# Altium PCB PCB2.PcbDoc
Units mm, origin at the board's own origin, x right, y up, seen from the top; angles counter-clockwise.
Board outline 116.59 x 88.77 mm, 2 copper layers (Top Layer, Bottom Layer); 12 components, 14 nets, 81 pads, 0 vias.
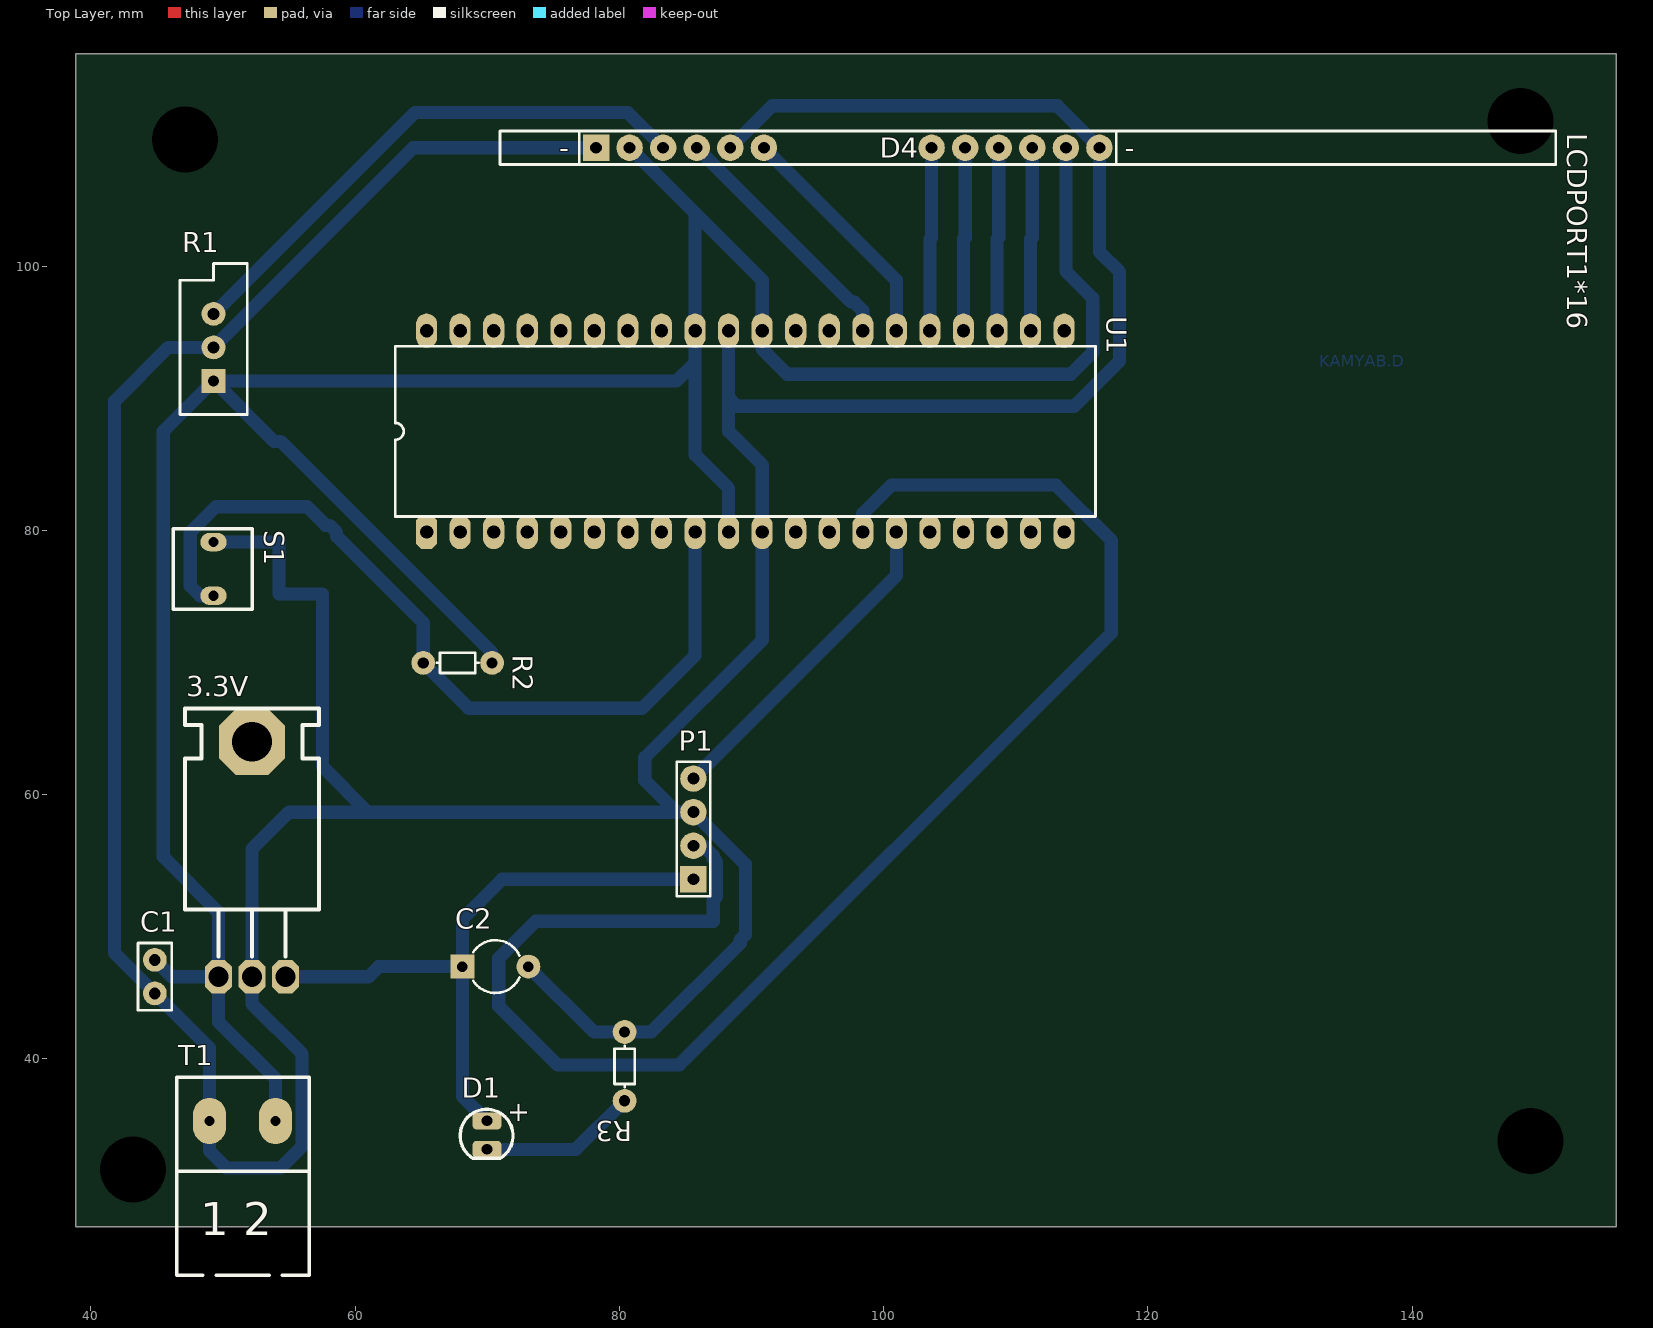
[diagram p0: Top Layer view]
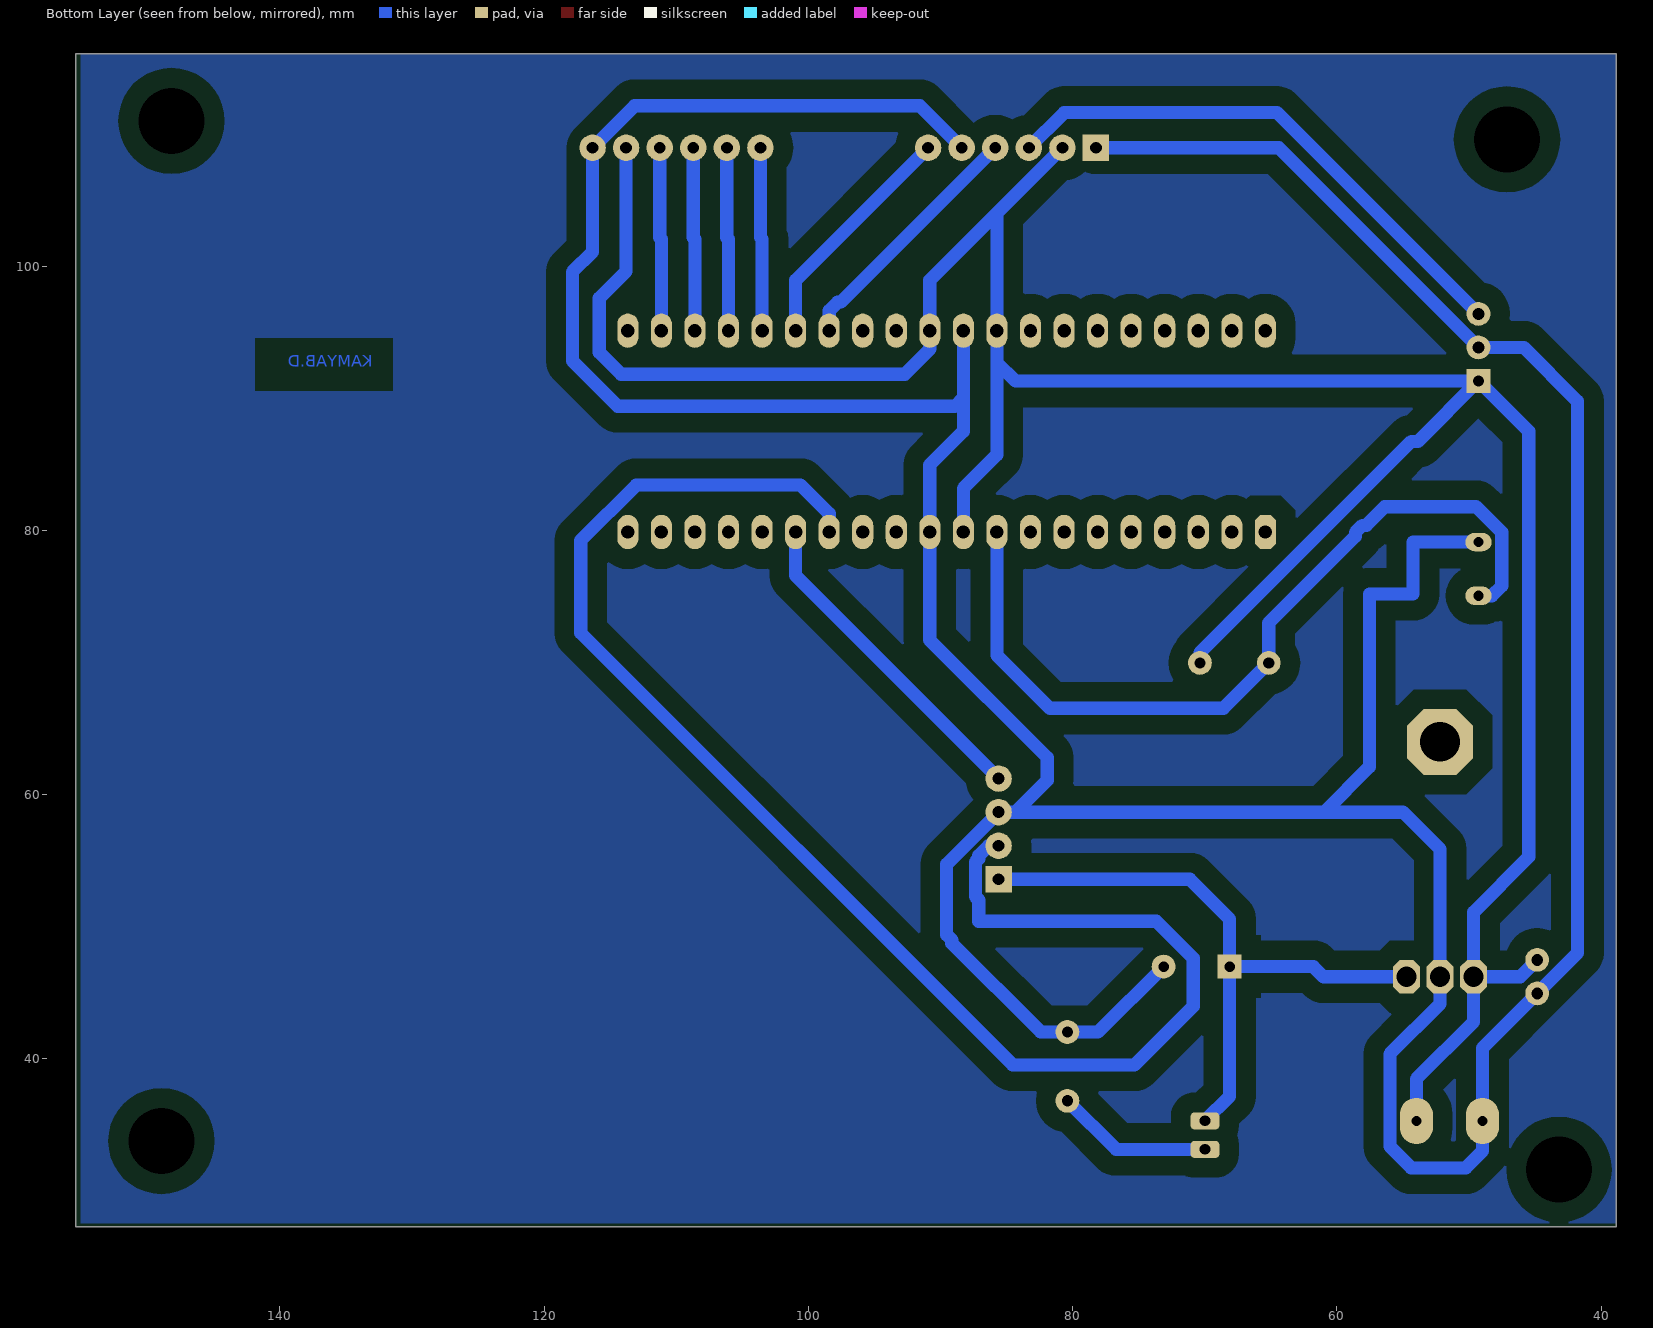
[diagram p1: Bottom Layer view, seen from below]

## Layer stack, top to bottom
Top Solder: solder mask 0.0102, Solder Resist, Dk 3.5
Top Layer: signal copper 0.0356
Dielectric 1: dielectric 0.32, FR-4, Dk 4.8
Bottom Layer: signal copper 0.0356
Bottom Solder: solder mask 0.0102, Solder Resist, Dk 3.5

## Board outline
38.862,27.305 155.448,27.305 155.448,116.078 38.862,116.078

## Design rules (kind name [scope] priority, off if disabled: settings)
Clearance pol [InPolygon] p1: gap=1.5
Clearance [All] p2: gap=0.254
PolygonConnect [All] p1: connectstyle=Relief reliefconductorwidth=0.254 reliefentries=4 polygonreliefangle="90 Angle" airgapwidth=0.254
RoutingVias [All] p1: holewidth=0.711 width=1.27 viastyle="Through Hole" minholewidth=0.711 minwidth=1.27 maxholewidth=0.711 maxwidth=1.27
SolderMaskExpansion [All] p1: expansion=0.102
Width [All] p1: maxlimit=1 minlimit=1 preferedwidth=1
30 further rules are at their usual default settings.

## Components (designator, comment, footprint, x,y, rotation, side; value= is the part's Value field where it differs from the comment)
3.3V "7805" My_TO-220 49.657,46.228 r0 top
C1 "Cap" RAD-0.1 44.831,46.228 r90 top
C2 "Cap2" CAPR5-4X5 70.612,46.99 r0 top
D1 "LED 3mm" LED-3mm 69.85,34.29 r0 top
LCDPORT1*16 "LCDPORT1*16" HDR1X16 70.866,108.966 r0 top
P1 "Header 4" HDR1X4 85.598,53.594 r90 top
R1 "RPot" VR5 49.276,93.853 r90 top
R2 "Resistor vertical" Res50 68.961,69.977 r0 top
R3 "Resistor vertical" Res50 80.391,38.227 r270 top
S1 "PB-2pin" PB-2pin 46.228,80.137 r270 top
T1 "Phoenix terminal" "phoenix terminal 2" 46.482,23.622 r0 top
U1 "ATmega16-16PI" My_40P6 89.535,87.503 r0 top

## Footprints (in the part's own frame and the unit in brackets; to place one, negate y for a bottom-side part, rotate by r counter-clockwise, add the part's x,y. Pads: shape width x height; smd on the part's side, far side on the other; paste and mask are expansions set on the pad)
CAPR5-4X5 [mm] "Capacitor; 2 Leads"
  rect 1.8x1.8 hole 0.8: 1(-2.5,0)
  round 1.8 hole 0.8: 2(2.5,0)
  silkscreen extent -1.69,-2 1.82,2
HDR1X4 [mm] "Connector; Header; 4 Position"
  rect 2x2 hole 0.9: 1(0,0)
  round 2 hole 0.9: 2(2.54,0) 3(5.08,0) 4(7.62,0)
  silkscreen extent -1.27,-1.27 8.89,1.27
HDR1X16 [mm] "LCD; Connector; Header; 16 Position"
  rect 2x2 hole 0.9: 1(7.366,0)
  round 2 hole 0.9: 2(9.906,0) 3(12.446,0) 4(14.986,0) 5(17.526,0) 6(20.066,0) 11(32.766,0) 12(35.306,0) 13(37.846,0) 14(40.386,0) 15(42.926,0) 16(45.466,0)
  silkscreen extent 0.1,-1.27 80,1.27
LED-3mm [mm] "LED; 2 Leads"
  rrect50% 2.2x1.3 hole 0.8: 1(0.127,1.016) 2(0.127,-1.143)
  silkscreen extent -1.9,-1.81 2.09,1.89
My_40P6 [mm]
  oct 1.6x2.6 hole 1.016: 1(-24.13,-7.62)
  oval 1.6x2.6 hole 1.016: 2(-21.59,-7.62) 3(-19.05,-7.62) 4(-16.51,-7.62) 5(-13.97,-7.62) 6(-11.43,-7.62) 7(-8.89,-7.62) 8(-6.35,-7.62) 9(-3.81,-7.62) 10(-1.27,-7.62) 11(1.27,-7.62) 12(3.81,-7.62) 13(6.35,-7.62) 14(8.89,-7.62) 15(11.43,-7.62) 16(13.97,-7.62) 17(16.51,-7.62) 18(19.05,-7.62) 19(21.59,-7.62) 20(24.13,-7.62) 21(24.13,7.62) 22(21.59,7.62) 23(19.05,7.62) 24(16.51,7.62) 25(13.97,7.62) 26(11.43,7.62) 27(8.89,7.62) 28(6.35,7.62) 29(3.81,7.62) 30(1.27,7.62) 31(-1.27,7.62) 32(-3.81,7.62) 33(-6.35,7.62) 34(-8.89,7.62) 35(-11.43,7.62) 36(-13.97,7.62) 37(-16.51,7.62) 38(-19.05,7.62) 39(-21.59,7.62) 40(-24.13,7.62)
  silkscreen extent -26.5,-6.45 26.5,6.45
My_TO-220 [mil]
  oct 196.85x196.85 hole 118.11: 0(99.49,699.49)
  oct 80x100 hole 60: 1(-0.5,-0.5) 2(99.5,-0.5) 3(199.5,-0.5)
  silkscreen extent -100,60 300,800
PB-2pin [mil] "Switch"
  oval 55.12x78.74 hole 30: 1(40,120) 2(200,120)
  silkscreen extent 0,0 240,235
"phoenix terminal 2" [mil] "2 terminals"
  oval 98.43x137.8 hole 30: 1(98.15,460) 2(295,460)
  silkscreen extent 0,0 395,591
RAD-0.1 [mm] "Radial Cap, Thru-Hole; 2 Leads; 0.1 in Pin Spacing"
  round 1.8 hole 0.9: 1(-1.27,0) 2(1.27,0)
  silkscreen extent -2.54,-1.27 2.54,1.27
Res50 [mm] "50mm Pin Spacing"
  round 1.8 hole 0.85: 1(-3.81,0) 2(1.397,0)
  silkscreen extent -2.77,-0.76 0.38,0.76
VR5 [mm] "Thru-Hole; 3 Leads"
  rect 1.8x1.8 hole 0.8: 1(-2.54,0)
  round 1.8 hole 0.9: 2(0,0) 3(2.54,0)
  silkscreen extent -5.08,-2.54 6.35,2.54

## Part data
3.3V: "Regulator"
C1 C2: "Capacitor"
D1: "Typical LED"
LCDPORT1*16: library part "LCDPORT 1*16", "LCDPORT 1*16; 80mm*36mm"
P1: "Header, 4-Pin"
R1: "Potentiometer"
R2 R3: "Resistor 0.5"
S1: "Switch"
T1: library part "Phoenix terminal 2", "Terminal 2 Pin"
U1: "AVR 16K Bytes of In-System Programmable Flash Memory"

## Free pads (board coordinates)
  round 0 hole 5: 2(148.971,33.782) 3(47.117,109.601) 4(148.209,110.998) 5(43.18,31.623)

## Nets (pads, with @x,y where several pads share a name; then routed paths per layer and width w, separated by ;. In a path a pad name is that pad's centre, name@x,y a point inside that pad or via, vN(x,y) a via of type N, cw(c..) or ccw(c..) an arc to the next point about the centre after c; other vN are vias at no path point)
GND: 3.3V.2 C1.1 C2.2 LCDPORT1*16.1 LCDPORT1*16.5 LCDPORT1*16.16 P1.3 R1.2 R3.1 S1.1 T1.1 U1.11 U1.31 | length 355.8
  Bottom Layer w1: S1.1 54.229,79.121 54.229,75.184 57.531,75.184 57.531,62.103 60.96,58.674 ; C2.2 78.065,42.037 R3.1 82.423,42.037 89.143,48.757 89.143,49.011 89.535,49.403 89.535,54.737 P1.3 ; LCDPORT1*16.1 64.389,108.966 R1.2 45.847,93.853 41.783,89.789 41.783,48.006 C1.1 48.975,40.814 T1.1 48.975,33.02 50.245,31.75 54.36,31.75 55.982,33.372 55.982,40.373 52.184,44.171 3.3V.2 52.184,55.88 54.978,58.674 60.96,58.674 ; U1.31 88.265,90.043 ; LCDPORT1*16.5 91.567,112.141 113.157,112.141 LCDPORT1*16.16 116.332,101.092 117.856,99.568 117.856,92.837 114.427,89.408 88.9,89.408 88.265,90.043 ; 60.96,58.674 P1.3 ; P1.3 84.328,58.674 81.915,61.087 81.915,62.814 90.805,71.704 U1.11 90.805,84.963 88.265,87.503 88.265,90.043
NetD1_2: D1.2 R3.2 | length 11.9
  Bottom Layer w1: D1.2 76.708,33.147 R3.2
NetLCDPORT1*16_3: LCDPORT1*16.3 R1.3 | length 41.5
  Bottom Layer w1: R1.3 64.516,111.633 80.645,111.633 LCDPORT1*16.3
NetLCDPORT1*16_4: LCDPORT1*16.4 U1.27 | length 19.2
  Bottom Layer w1: LCDPORT1*16.4 97.536,97.282 97.79,97.282 98.425,96.647 U1.27
NetLCDPORT1*16_6: LCDPORT1*16.6 U1.26 | length 18
  Bottom Layer w1: LCDPORT1*16.6 100.965,98.933 U1.26
NetLCDPORT1*16_11: LCDPORT1*16.11 U1.25 | length 13.9
  Bottom Layer w1: U1.25 103.505,102.057 103.632,102.184 LCDPORT1*16.11
NetLCDPORT1*16_12: LCDPORT1*16.12 U1.24 | length 13.9
  Bottom Layer w1: U1.24 106.045,102.057 106.172,102.184 LCDPORT1*16.12
NetLCDPORT1*16_13: LCDPORT1*16.13 U1.23 | length 13.9
  Bottom Layer w1: U1.23 108.585,102.057 108.712,102.184 LCDPORT1*16.13
NetLCDPORT1*16_14: LCDPORT1*16.14 U1.22 | length 13.9
  Bottom Layer w1: U1.22 111.125,102.057 111.252,102.184 LCDPORT1*16.14
NetP1_2: P1.2 U1.14 | length 119.6
  Bottom Layer w1: P1.2 86.36,56.134 87.102,55.392 87.102,55.156 87.352,54.906 87.352,52.282 87.102,52.032 87.102,50.419 73.66,50.419 70.866,47.625 70.866,43.993 75.311,39.548 84.531,39.548 117.221,72.238 117.221,79.248 113.03,83.439 100.584,83.439 98.425,81.28 U1.14
NetP1_4: P1.4 U1.15 | length 25
  Bottom Layer w1: P1.4 100.965,76.581 U1.15
NetR2_1: R2.1 S1.2 U1.9 | length 64.4
  Bottom Layer w1: S1.2 48.26,75.057 47.522,75.795 47.522,79.856 49.454,81.788 56.363,81.788 57.771,80.38 58.059,80.38 58.587,79.852 58.587,79.564 65.151,73 R2.1 68.58,66.548 81.712,66.548 85.725,70.561 U1.9
VCC: 3.3V.1 C1.2 LCDPORT1*16.2 LCDPORT1*16.15 R1.1 R2.2 T1.2 U1.10 U1.30 U1.32 | length 221.3
  Bottom Layer w1: C1.2 46.114,46.215 3.3V.1 ; T1.2 53.975,38.481 49.644,42.812 3.3V.1 ; R2.2 70.358,70.739 54.356,86.741 53.848,86.741 R1.1 ; LCDPORT1*16.2 85.725,104.013 ; U1.10 88.265,83.185 85.725,85.725 85.725,92.71 ; LCDPORT1*16.15 113.792,99.623 115.824,97.591 115.824,93.472 114.173,91.821 92.71,91.821 90.805,93.726 U1.30 90.805,98.933 85.725,104.013 ; R1.1 84.328,91.313 85.725,92.71 ; R1.1 45.466,87.503 45.466,55.296 49.644,51.117 3.3V.1 ; 85.725,92.71 U1.32 85.725,104.013
VCC1: 3.3V.3 C2.1 D1.1 P1.1 | length 48.5
  Bottom Layer w1: 3.3V.3 61.011,46.215 61.785,46.99 C2.1 ; D1.1 68.112,37.171 C2.1 ; P1.1 71.12,53.594 68.112,50.586 C2.1
pads on no net: 3.3V.0 U1.1 U1.2 U1.3 U1.4 U1.5 U1.6 U1.7 U1.8 U1.12 U1.13 U1.16 U1.17 U1.18 U1.19 U1.20 U1.21 U1.28 U1.29 U1.33 U1.34 U1.35 U1.36 U1.37 U1.38 U1.39 U1.40

## Polygon pours and split planes (outlines as drawn)
GND on Bottom Layer "Bottom Layer-No Net" (solid, pour order 4): 155.067,116.078 155.067,27.559 155.321,27.305 155.067,27.559 38.862,27.559 38.862,115.951 38.735,116.078

## Other copper
Bottom Layer:
  text "KAMYAB.D" at 132.969,92.075 h1.52

## Text inside footprints (layer, text, board x,y; h text height)
D1: Top Overlay "+" at 73.025,35.052 h1.52 r90
LCDPORT1*16: Top Overlay "-" at 75.438,108.204 h1.52; Top Overlay "-" at 118.237,108.204 h1.52; Top Overlay "D4" at 99.695,108.204 h1.52
T1: Top Overlay "1 2" at 48.26,26.67 h2.5